# EAGLE board protoboard5vpsrev1 (EAGLE 5.06)

Size 50.78 x 33.96 mm. Coordinates in mm from the lower left corner, seen from the top.
Outline: 0,0 50.78,0 50.78,33.96 0,33.96 0,0
Copper layers (1*16): Top 0.035mm / dielectric 1.5mm / Bottom 0.035mm
Design rules "default": minimum track width 10mil, minimum drill 24mil, track to track 8mil, track to pad 8mil, pad to pad 8mil, via to via 8mil, smd to smd 8mil, copper to edge 40mil, drill to drill 8mil, minimum pad ring 10mil, minimum via ring 8mil, stop-mask expansion 4mil, vias tented up to drill 0mil, thermal gap 10mil

## Footprints (pad centres in the part's own frame; a part is rotated, then mirrored left to right if it is on the bottom)
CPOL-RADIAL-10UF-25V = drill 0.7 pad 1.651 square: 1 1.27,0 | drill 0.7 pad 1.651 round: 2 -1.27,0
DIODE-1N4148 = drill 0.9 pad 1.88 round: A -3.81,0; C 3.81,0
317TL = drill 1.016 long: 1 -2.54,-3.81; 2 0,-3.81; 3 2.54,-3.81 | hole 3.302: 0,11.176
POWER_JACK_PTH = drill 2.997 round: GND 0,7.7; GNDBREAK 4.7,10.7; PWR 0,13.7
1X02_LOCK = drill 1.016 pad 1.88 round: 1 -0.178,0; 2 2.718,0
AXIAL-0.3 = drill 0.9 pad 1.88 round: P$1 -3.81,0; P$2 3.81,0

## Placement (x,y rotation side)
C1  u1  [CPOL-RADIAL-10UF-25V]  16.51,21.59 90 top
C2  10u  [CPOL-RADIAL-10UF-25V]  16.51,12.7 90 top
D1  1N914  [DIODE-1N4148]  6.35,25.4 0 top
D2  1N914  [DIODE-1N4148]  6.35,8.89 180 top
IC1  LM317  [317TL]  26.67,16.51 270 top
J1  DCIN  [POWER_JACK_PTH]  -2.54,17.78 270 top
JP1  PWR  [1X02_LOCK]  46.99,17.78 270 top
R1  240  [AXIAL-0.3]  26.67,24.13 0 top
R2  715  [AXIAL-0.3]  26.67,8.89 0 top

## Library data of the parts
C1 C2 D1 D2 J1 JP1 R1 R2 = SparkFun-2009-11-03
IC1 = v-reg

## Nets
5V: C2.1 JP1.1 R1.P$2
GND: C1.2 C2.2 D2.A JP1.2 R2.P$1
N$1: C1.1 D1.C IC1.3
N$2: IC1.1 R1.P$1 R2.P$2
N$3: D1.A J1.PWR
N$4: D2.C J1.GND J1.GNDBREAK

## Tracks (layer width: path | path; a pad name or v marks a point on that pad's centre or on a via)
5V  (2 unrouted)
GND  (4 unrouted)
N$1  (2 unrouted)
N$2  (2 unrouted)
N$3  (1 unrouted)
N$4  (2 unrouted)

## Text on the board
Bottom: Protoboard 5V PS | 5V | GND | Daniel Salinas